# Altium PCB 2X-4.5-V3.PcbDoc (part 1 of 2)
Units mil, origin at the board's own origin, x right, y up, seen from the top; angles counter-clockwise.
Board outline 5631.85 x 1583.52 mil, 2 copper layers (TopLayer, BottomLayer); 126 components, 147 nets, 448 pads, 610 vias.
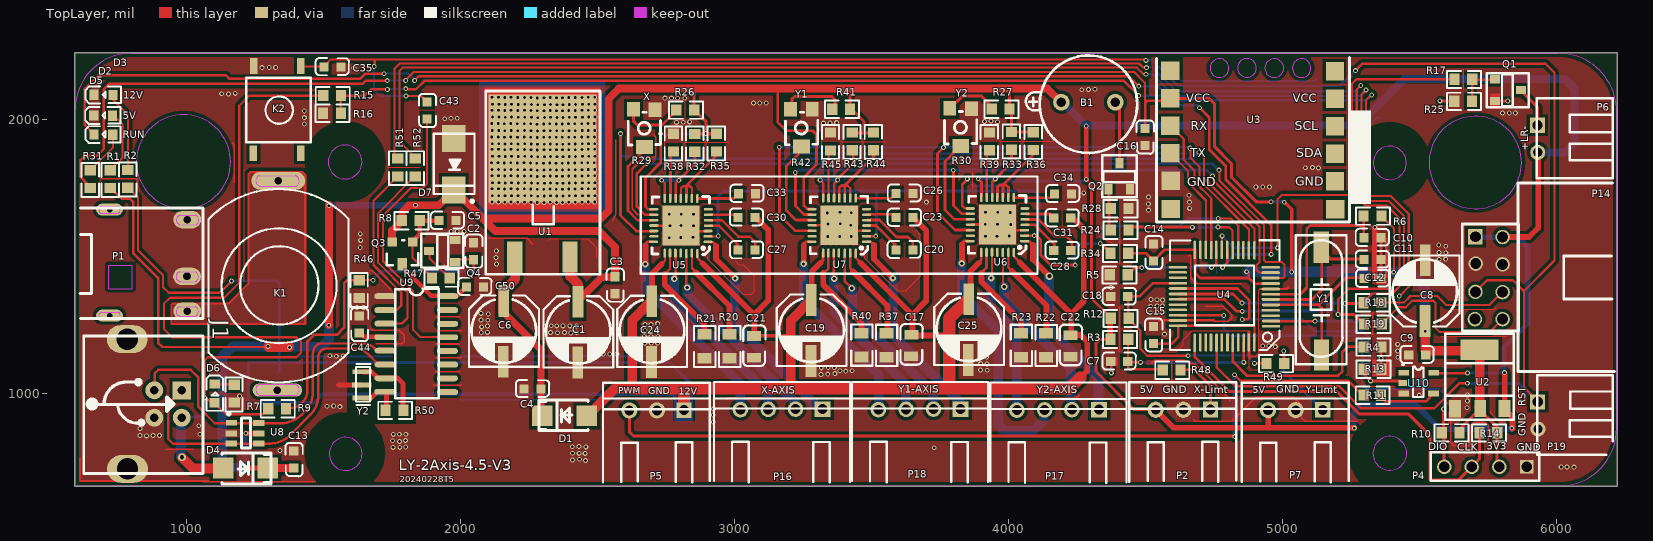
[diagram p0: TopLayer view]
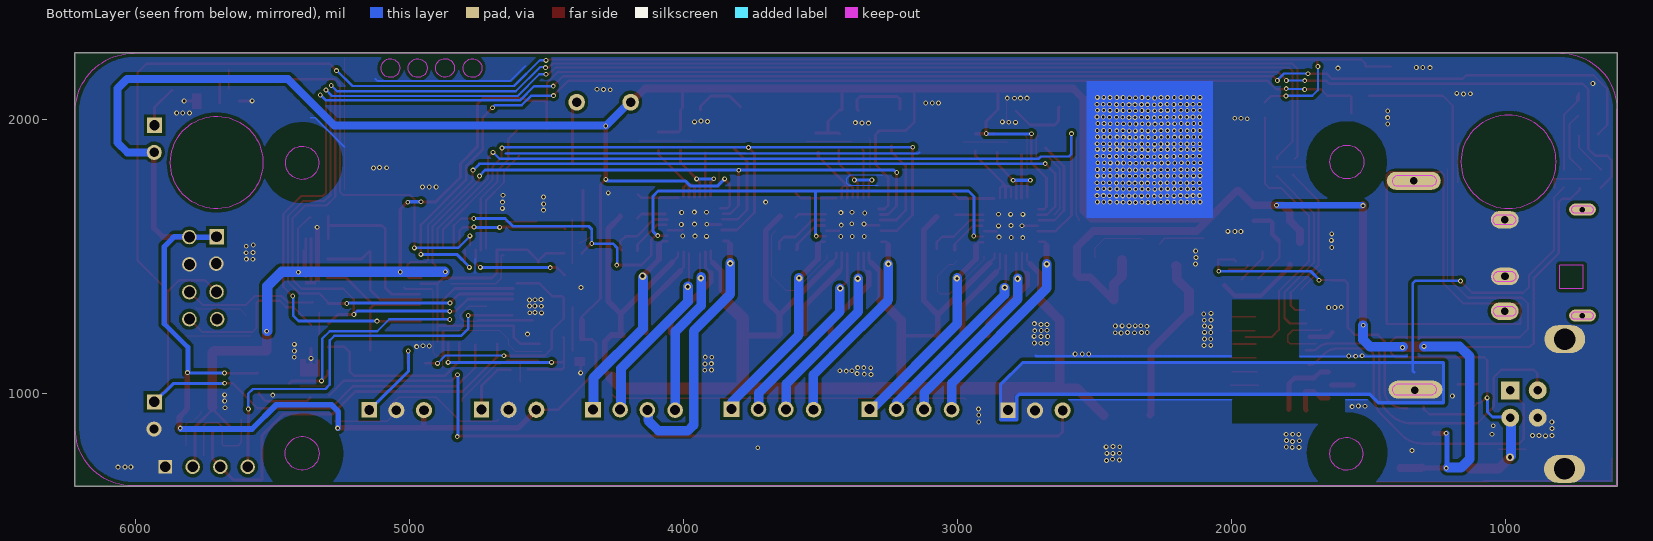
[diagram p1: BottomLayer view, seen from below]

## Layer stack, top to bottom
TopSolder: solder mask 0.4, Solder Resist, Dk 3.5
TopLayer: signal copper 1.4
Dielectric1: core 12.6, FR-4, Dk 4.8
BottomLayer: signal copper 1.4
BottomSolder: solder mask 0.4, Solder Resist, Dk 3.5

## Board outline
591.03,661.34 6222.88,661.34 6222.88,2244.86 591.03,2244.86

## Design rules (kind name [scope] priority, off if disabled: settings)
Clearance [All] p1: gap=7.87 ignorepadtopadclearanceinfootprint=FALSE
FabricationTestPointUsage TestPointUsage [All] p1: valid=0 allowmultiple=FALSE
FabricationTestpoint Testpoint [All] p1: side=3 testpointundercomponent=TRUE minsize=40 maxsize=100 preferedsize=60 minholesize=20 maxholesize=40 preferedholesize=32 testpointgrid=1 allowsidetop=TRUE allowsidebottom=TRUE usegrid=TRUE gridtolerance=0.01
PolygonConnect [All] p1: connectstyle=Relief reliefconductorwidth=0 reliefentries=4 polygonreliefangle="90 Angle" airgapwidth=10
RoutingVias [All] p1: holewidth=28 width=50 viastyle="Through Hole" minholewidth=28 minwidth=50 maxholewidth=28 maxwidth=50
SolderMaskExpansion [All] p1: expansion=4
Width [All] p1: maxlimit=10 minlimit=10 preferedwidth=10
28 further rules are at their usual default settings.

## Components (designator, comment, footprint, x,y, rotation, side; value= is the part's Value field where it differs from the comment)
B1 "" B1 4215.19,2065.81 r0 top locked
C1 "100uf 35v" C1 2437.58,1304.56 r0 top locked
C2 "104/50v 0603" C13 2040.08,1481.64 r0 top locked
C3 "104/50v 0603" C13 2556.33,1357.47 r0 top locked
C4 "104/50V 0603" C13 2300.92,1009.97 r90 top locked
C5 "103/50V 0603" C13 1990.08,1624.56 r90 top locked
C6 "100uf/35V" C1 2165.92,1307.06 r0 top locked
C7 "103/50V 0603" C13 4442.58,1110.81 r90 top locked
C8 "100uf/35V" C1 5511.75,1295.81 r180 top locked
C9 "104/50V/0603" C13 5530.08,1134.56 r90 top locked
C10 "104/50v 0603" C13 5366.75,1562.06 r90 top locked
C11 "22pf 50v/0603" C13 5366.75,1482.06 r90 top locked
C12 "22pf/50v 0603" C13 5367.16,1412.89 r90 top locked
C13 "104/50v 0603" C13 1383.83,721.22 r0 top locked
C14 "104/50v 0603" C13 4522.58,1477.06 r0 top locked
C15 "104/50v 0603" C13 4522.16,1176.02 r0 top locked
C16 "104/50v 0603" C13 4490.91,1898.31 r0 top locked
C17 "105/50V 0805" C17 3638.41,1188.72 r0 top locked
C18 "103/50V 0603" C13 4442.58,1347.06 r90 top locked
C19 "100uf/35V" C1 3289.25,1310.39 r0 top locked
C20 "104/50v 0603" C13 3658,1517.89 r90 top locked
C21 "105/50V 0805" C17 3064.67,1183.31 r0 top locked
C22 "105/50V 0805" C17 4220.08,1186.64 r0 top locked
C23 "104/50v 0603" C13 3658,1635.39 r90 top locked
C24 "100uf/35V" C1 2706.75,1306.22 r0 top locked
C25 "100uf/35V" C1 3863.83,1313.72 r0 top locked
C26 "224/25V 0603" C13 3658.41,1723.72 r90 top locked
C27 "104/50v 0603" C13 3082.17,1517.06 r90 top locked
C28 "104/50v 0603" C13 4234.25,1514.97 r90 top locked
C30 "104/50v 0603" C13 3081.75,1636.22 r90 top locked
C31 "104/50v 0603" C13 4234.25,1633.72 r90 top locked
C33 "224/25V 0603" C13 3083.42,1722.89 r90 top locked
C34 "224/25V 0603" C13 4236.75,1722.06 r90 top locked
C35 "104/50v 0603" C13 1569.87,2185.39 r90 top locked
C43 "104/50v 0603" C13 1870.92,1995.39 r0 top locked
C44 "104/50v 0603" C13 1623,1214.14 r0 top locked
C50 "104/50v 0603" C13 2090.08,1382.89 r90 top locked
D1 "SS54/SMA" D4 2459.25,925.81 r180 top locked
D2 "LED-R/0603" D3 736.75,2018.72 r0 top locked
D3 "LED-R/0603" D3 738,2093.72 r0 top locked
D4 "SS54/SMA" D4 1135.08,721.64 r0 top locked
D5 "LED-G/0603" D3 737.17,1949.14 r0 top locked
D6 "LED-R/0603" D3 1105.92,959.56 r270 top locked
D7 "AE/SMB" D7 1959.25,1868.72 r0 top locked
J1 "4P USB" J1 976.02,1049.14 r0 top locked
K1 "KAN-9A" K1 1285.29,1745.81 r0 top locked
K2 "6*6*11" K2 1248.83,1947.89 r0 top locked
P1 "DC044A" P1 1003.42,1612.06 r0 top locked
P2 "" P5 4717.58,929.14 r0 top locked
P4 "" P4 5850.08,725.39 r0 top locked
P5 "" P5 2795.92,927.06 r0 top locked
P6 "XH2.54-2P-90" P19 5974.25,1983.72 r0 top locked
P7 "" P5 5127.58,927.47 r0 top locked
P14 "DC3-8P" J10 5729.79,1506.64 r0 top locked
P16 "" P16 3299.67,908.31 r0 top locked
P17 "" P16 4308.83,906.64 r0 top locked
P18 "" P16 3803.41,908.31 r0 top locked
P19 "XH2.54-2P-90" P19 5975.08,973.72 r0 top locked
Q1 "MMBT5551/SOT-23" Q4 5776.75,2141.64 r180 top locked
Q2 "MMBT5551/SOT-23" Q4 4370.91,1747.06 r270 top locked
Q3 "MMBT5401/SOT-23" Q3 1794.25,1538.72 r0 top locked
Q4 "MMBT5551/SOT-23" Q4 1979.25,1487.06 r0 top locked
R1 "1K/0603" R31#1 720.5,1740.39 r0 top locked
R2 "2K/0603" R31#1 784.25,1741.64 r0 top locked
R3 "10K/0603" R31#1 4447.58,1197.06 r90 top locked
R4 "10K/0603" R31#1 5372.16,1169.14 r90 top locked
R5 "10K/0603" R31#1 4445.08,1432.47 r90 top locked
R6 "10K/0603" R31#1 5371.33,1647.47 r90 top locked
R7 "1K/0603" R31#1 1172.17,957.47 r0 top locked
R8 "10K/0603" R31#1 1860.5,1630.81 r90 top locked
R9 "2K/0603" R31#1 1372.58,944.14 r90 top locked
R10 "10K/0603" R31#1 5656.75,856.22 r90 top locked
R11 "100R/0603" R31#2 5369.68,993.31 r90 top locked
R12 "10K/0603" R31#1 4448.83,1273.72 r90 top locked
R13 "2K/0603" R31#1 5372.16,1088.31 r90 top locked
R14 "10K/0603" R31#1 5794.66,855.81 r90 top locked
R15 "5.1K/0603" R31#1 1573.42,2087.47 r90 top locked
R16 "10K/0603" R31#1 1573,2022.47 r90 top locked
R17 "2K/0603" R31#1 5703.41,2146.22 r90 top locked
R18 "100R/0603" R31#3 5370.91,1331.22 r90 top locked
R19 "100R/0603" R31#1 5373,1252.89 r90 top locked
R20 "R100/0805" R40 2981.33,1211.22 r0 top locked
R21 "R100/0805" R40 2890.08,1211.22 r0 top locked
R22 "R100/0805" R40 4137.16,1214.97 r0 top locked
R23 "R100/0805" R40 4046.33,1215.39 r0 top locked
R24 "2K/0603" R31#1 4448.41,1596.22 r90 top locked
R25 "10K/0603" R31#1 5702.58,2066.43 r90 top locked
R26 "30K/0603" R31#1 2862.58,2034.56 r90 top locked
R27 "30K/0603" R31#1 4014.25,2037.89 r90 top locked
R28 "10K/0603" R31#1 4448.41,1674.56 r90 top locked
R29 "3*3 10K" R29 2745.08,2033.72 r0 top locked
R30 "3*3 10K" R29 3899.66,2037.06 r0 top locked
R31 "1K/0603" R31#1 647.58,1740.39 r0 top locked
R32 "10K/0603" R31#1 2854.25,1872.89 r0 top locked
R33 "10K/0603" R31#1 4010.08,1880.39 r0 top locked
R34 "10K/0603" R31#1 4447.58,1511.22 r90 top locked
R35 "100R/0603" R31#1 2933,1873.72 r0 top locked
R36 "100R/0603" R31#1 4090.08,1879.14 r0 top locked
R37 "R100/0805" R40 3554.25,1215.39 r0 top locked
R38 "10K/0603" R31#1 2776.33,1873.72 r0 top locked
R39 "10K/0603" R31#1 3929.66,1878.72 r0 top locked
R40 "R100/0805" R40 3464.25,1215.81 r0 top locked
R41 "30K/0603" R31#1 3431.75,2037.47 r90 top locked
R42 "3*3 10K" R29 3318.83,2034.56 r0 top locked
R43 "10K/0603" R31#1 3428.41,1878.72 r0 top locked
R44 "100R/0603" R31#1 3506.33,1878.72 r0 top locked
R45 "10K/0603" R31#1 3349.67,1877.89 r0 top locked
R46 "10K/0603" R31#1 1629.25,1338.72 r0 top locked
R47 "2K/0603" R31#1 1970.5,1421.22 r90 top locked
R48 "470R/0603" R31#1 4638,1084.97 r90 top locked
R49 "470R/0603" R31#1 5016.75,1109.14 r90 top locked
R50 "1M/0603" R31#1 1801.33,938.31 r90 top locked
R51 "100R/0603" R31#1 1769.67,1782.89 r0 top locked
R52 "100R/0603" R31#1 1833.83,1782.89 r0 top locked
U1 "7805/TO263-3" U1 2185.92,1467.89 r0 top locked
U2 "1117-3.3/SOT-223" U2 5639.25,938.72 r0 top locked
U3 "" U3 4598.21,2168.93 r0 top locked
U4 "GD32F303CCT6" U4 4962.58,1252.89 r0 top locked
U5 "HR4988" U5 2893.42,1525.81 r0 top locked
U6 "HR4988" U5 4048.83,1528.93 r0 top locked
U7 "HR4988" U5 3471.23,1526.64 r0 top locked
U8 "UL26-SOT23-6" U8 1158.83,907.89 r0 top locked
U9 "CH340G/SOP-16" U9 1748.73,1345.81 r0 top locked
U10 "74LVC1G17/SOT23-5" V10 5466.33,1065.81 r0 top locked
Y1 "8M/HC49S" Y1 5120.08,1487.89 r0 top locked
Y2 "12M" Y2 1652.58,987.47 r0 top locked

## Footprints (in the part's own frame and the unit in brackets; to place one, negate y for a bottom-side part, rotate by r counter-clockwise, add the part's x,y. Pads: shape width x height; smd on the part's side, far side on the other; paste and mask are expansions set on the pad)
B1 [mil]
  round 60.93 hole 34: 1(-22,-2) 2(175,-2)
  silkscreen extent -152,-187 255,169
C1 [mil]
  rect 38.74x116.11 smd: 1(-9,31) 2(-10,-191)
  silkscreen extent -135,-209 120,51
C13 [mil]
  rect 33.37x33.37 smd: 1(7,7) 2(7,69)
  silkscreen extent -23,-23 40,99
C17 [mil]
  rect 50.93x34.93 smd: 1(7,27) 2(6,-52)
  silkscreen extent -33,-83 49,66
D3 [mil]
  rect 33.37x37.37 smd: 1(-7,-4) 2(-76,-3)
  silkscreen extent -107,-34 22,27
D4 [mil]
  rect 74.94x75.37 smd: 1(-2,7) 2(161,7)
  silkscreen extent -6,-51 173,61
D7 [mil]
  rect 84.74x98.11 smd: 1(16,62) 2(16,-125)
  silkscreen extent -57,-169 92,80
J1 [mil]
  rect 67.37x65.37 hole 32: 1(6,-37)
  round 65.37 hole 32: 2(6,-137) 3(-94,-37) 4(-94,-137)
  oval 149.37x101.37 hole 78: 5(-193,150) 6(-192,-324)
  silkscreen extent -352,-341 84,161
J10 [mil]
  rect 52.93x54.93 hole 40: 1(-25,66)
  round 52.93 hole 40: 2(74,65) 3(-24,-32) 4(74,-35) 5(-25,-135) 6(74,-136) 7(-27,-235) 8(74,-235)
  silkscreen extent -73,-278 132,113
K1 [mil]
  oval 197.37x65.37 hole 28: 1(49,31)
  oval 181.1x47.24 hole 28: 2(46,-733)
  KeepOutLayer lines w4: -19,-712 112,-712 ; -18.99,-711.92 ccw(c-13,-731) -17.6,-750.46 ; -19,50 112,50 ; -18.99,50.08 ccw(c-13,31) -17.6,11.54 ; -18,-751 114,-751 ; -18,11 115,11 ; 112.02,-711.51 cw(c104,-732) 114.85,-751.14 ; 112.02,50.49 cw(c104,30) 114.85,10.86
  silkscreen extent -205,-705 305,1
K2 [mil]
  rect 27.37x57.37 smd: 1(-5,-70) 2(168,-70) 3(168,248) 4(-4,248)
  silkscreen extent -31,-31 205,206
P1 [mil]
  oval 101.37x63.37 hole 28: 1(-1,-311) 2(-2,-184) 3(-1,23)
  oval 97.37x43.37 hole 20: 4(-285,60) 5(-285,-327)
  KeepOutLayer lines w4: -317.45,-340.39 cw(c-309,-328) -316.15,-314.82 ; -317.45,46.61 cw(c-309,59) -316.15,72.18 ; -317,-340 -254,-340 ; -317,47 -253,47 ; -316,-315 -254,-315 ; -316,72 -254,72 ; -253.89,-315.67 cw(c-258,-328) -253.46,-340.18 ; -253.89,72.33 cw(c-258,60) -253.46,47.82 ; -30,-295 28,-295 ; -30,-168 28,-168 ; -29.91,-295 ccw(c-24,-312) -27.29,-329.7 ; -29.91,-168 ccw(c-24,-185) -27.29,-202.7 ; -29,-330 29,-330 ; -29,-203 28,-203 ; -29,39 29,39 ; -28.91,39 ccw(c-23,22) -26.29,4.3 ; -28,4 29,4 ; 28.14,-294.39 cw(c21,-312) 28.83,-329.31 ; 28.14,-168.39 cw(c21,-186) 28.83,-203.31 ; 29.14,38.61 cw(c22,21) 29.83,3.69
  silkscreen extent -392,-338 57,65
P4 [mil]
  rect 48.93x48.93 hole 38: 1(42,7)
  round 52.93 hole 38: 2(-58,7) 3(-159,7) 4(-259,7)
  silkscreen extent -309,-43 88,60
P5 [mil]
  rect 55.84x56.93 hole 36: 1(20,13)
  round 58.93 hole 36: 2(-79,12) 3(-180,12)
  silkscreen extent -276,-251 114,112
P16 [mil]
  rect 58.93x56.93 hole 36: 1(22,35)
  round 56.93 hole 36: 2(-77,35) 3(-177,34) 4(-278,33)
  silkscreen extent -375,-233 122,134
P19 [mil]
  rect 54.93x54.93 hole 38: 1(-43,-4)
  round 54.93 hole 34: 2(-42,-103)
  silkscreen extent -45,-197 231,94
Q3 [mil]
  rect 35.16x33.37 smd: 1(31,15) 2(-44,15)
  rect 33.37x45.16 smd: 3(-7,-66)
  silkscreen extent -63,-70 52,22
Q4 [mil]
  rect 37.16x29.37 smd: 1(1,-6) 2(1,73) 3(-94,34)
  silkscreen extent -123,-28 31,97
R29 [mil]
  rect 46.93x52.93 smd: 1(-35,3) 2(-114,4)
  rect 60.93x50.93 smd: 3(-74,-133)
  silkscreen extent -133,-126 -15,-7
R31#1 [mil]
  rect 41.37x37.37 smd: 1(1,10) 2(1,75)
  silkscreen extent -31,-22 32,102
R31#2 [mil]
  rect 41.37x37.37 smd: 1(1,10) 2(1.42,72.92)
  silkscreen extent -31,-22 32,102
R31#3 [mil]
  rect 37.01x37.37 smd: 1(1,9.98)
  rect 41.37x37.37 smd: 2(1,75)
  silkscreen extent -31,-22 32,102
R40 [mil]
  rect 50.93x38.93 smd: 1(0,5) 2(0,-82)
  silkscreen extent -38,-114 40,36
U1 [mil]
  rect 55.16x113.37 smd: 1(12,30) 3(213,31)
  rect 393.17x395.37 smd: 2(113,427)
  silkscreen extent -94,-32 323,637
U2 [mil]
  rect 42.93x62.93 smd: 1(-9,6) 2(83,7) 3(172,7)
  rect 138.93x74.93 smd: 4(81,222)
  silkscreen extent -45,-34 205,280
U3 [mil]
  rect 66.93x66.93 smd: 1(-7,10) 2(-7,-91) 3(-7,-191) 4(-7,-292) 5(-6,-392) 6(-6,-495) 7(595,-496) 8(594,-394) 9(594,-293) 10(594,-193) 11(594,-92) 12(594,8)
  silkscreen extent -57,-543 726,58
U4 [mm]
  oval 1.7x0.25 smd: 1(-0.102,-0.178) 2(-0.102,0.305) 3(-0.127,0.787) 4(-0.127,1.295) 5(-0.102,1.803) 6(-0.127,2.311) 7(-0.127,2.794) 8(-0.127,3.277) 9(-0.127,3.785) 10(-0.152,4.293) 11(-0.127,4.801) 12(-0.127,5.283) 25(-8.738,5.309) 26(-8.738,4.826) 27(-8.738,4.318) 28(-8.738,3.81) 29(-8.738,3.327) 30(-8.738,2.819) 31(-8.738,2.337) 32(-8.738,1.829) 33(-8.738,1.346) 34(-8.738,0.838) 35(-8.738,0.356) 36(-8.738,-0.127)
  oval 0.25x1.7 smd: 13(-1.651,6.858) 14(-2.159,6.858) 15(-2.667,6.883) 16(-3.15,6.883) 17(-3.658,6.883) 18(-4.166,6.909) 19(-4.674,6.909) 20(-5.182,6.909) 21(-5.639,6.883) 22(-6.147,6.909) 23(-6.655,6.909) 24(-7.163,6.909) 37(-7.163,-1.702) 38(-6.655,-1.676) 39(-6.147,-1.676) 40(-5.664,-1.676) 41(-5.156,-1.702) 42(-4.674,-1.676) 43(-4.14,-1.676) 44(-3.658,-1.702) 45(-3.15,-1.676) 46(-2.642,-1.702) 47(-2.159,-1.676) 48(-1.651,-1.676)
  silkscreen extent -9.47,-2.39 0.69,7.8
U5 [mil]
  oval 33.47x9.45 smd: 1(10,28) 2(10,48) 3(10,68) 4(11,87) 5(11,107) 6(11,127) 7(11,147) 15(-188,147) 16(-188,127) 17(-188,107) 18(-188,88) 19(-188,68) 20(-188,48) 21(-189,28)
  oval 9.45x33.47 smd: 8(-29,187) 9(-49,187) 10(-69,187) 11(-89,187) 12(-108,187) 13(-128,187) 14(-148,187) 22(-148,-13) 23(-129,-13) 24(-109,-13) 25(-90,-13) 26(-69,-14) 27(-49,-13) 28(-29,-14)
  rect 135.45x145.47 smd: 29(-89,88)
  silkscreen extent -195,-18 15,194
U8 [mil]
  rect 40.95x21.37 smd: 1(5,-14) 2(4,-53) 3(4,-90) 4(104,-90) 5(104,-53) 6(104,-15)
  silkscreen extent -9,-107 74,23
U9 [mil]
  oval 77.17x21.37 smd: 1(-25,10) 2(-25,-41) 3(-25,-90) 4(-25,-140) 5(-24,-189) 6(-24,-240) 7(-24,-290) 8(-25,-339) 9(204,-340) 10(203,-290) 11(204,-240) 12(203,-190) 13(204,-140) 14(204,-91) 15(204,-41) 16(204,10)
  silkscreen extent 13,-363 171,37
V10 [mil]
  rect 38.93x20.93 smd: 1(-23,10) 2(-23,-27) 3(-23,-65) 4(85,-65) 5(86,10)
  silkscreen extent -28,-78 49,40
Y1 [mil]
  rect 55.84x114.93 smd: 1(22,47)
  rect 55.84x112.93 smd: 2(23,-347)
  silkscreen extent -72,-381 114,90
Y2 [mil]
  rect 70.87x17.37 smd: 1(-12,-3) 2(-13,44) 3(-12,92)
  silkscreen extent -34,-29 18,120

## Part data
Y2: "CSTNE12M0G520000R0"

## Free pads (board coordinates)
  oval 196.93x64.93 smd far side: 6(1327.89,1014.56)

## Via types
v1: diameter 17.72, hole 9.84, TopLayer to BottomLayer, tented both sides, 597 vias
v2: diameter 23.62, hole 11.81, TopLayer to BottomLayer, tented both sides, 11 vias
v3: diameter 27.56, hole 15.75, TopLayer to BottomLayer, tented both sides, 2 vias

## Nets (pads, with @x,y where several pads share a name; then routed paths per layer and width w, separated by ;. In a path a pad name is that pad's centre, name@x,y a point inside that pad or via, vN(x,y) a via of type N, cw(c..) or ccw(c..) an arc to the next point about the centre after c; other vN are vias at no path point)
D3-2: C1.2 C2.2 C3.1 C4.2 C5.1 C6.2 C7.2 C8.2 C9.2 C10.1 C11.1 C12.1 C13.2 C14.2 C15.2 C16.1 C17.2 C18.2 C19.2 C21.2 C22.2 C24.2 C25.2 C26.1 C33.1 C34.1 C35.1 C44.2 C50.1 D2.2 D3.2 D7.1 J1.4 J1.5 J1.6 K2.4 P1.2 P1.3 P2.2 P4.1 P5.2 P7.2 P14.3 P14.4 P19.2 Q1.2 Q2.2 Q4.2 R4.1 R5.2 R7.1 R13.1 R16.2 R20.2 R21.2 R22.2 R23.2 R25.2 R28.1 R29.1 R30.1 R37.2 R38.2 R39.2 R40.2 R42.1 R45.2 R46.1 U1.2 U2.1 U3.5 U4.8 U4.23 U4.35 U4.47 U5.3 U5.18 U5.29 U6.3 U6.18 U6.29 U7.3 U7.18 U7.29 U8.2 U9.1 U10.3 Y2.2 | length 16951
  TopLayer w2.94: 5236.65,2224.77 5237.27,2224.14
  TopLayer w3.87: 1209.77,1409.14 1209.77,1816.64 1213.52,1820.39 ; 1667.69,1450.39 1674.35,1450.39 ; 1733.1,1827.47 1734.77,1825.81 1853.52,1825.81 ; 2320.6,1559.56 2326.85,1565.81 2464.77,1565.81 2497.27,1533.31 2497.27,1493.72 ; 2742.69,1821.64 2745.6,1824.56 2745.6,1933.31 R38.2@2763.1,1950.81 ; 2816.44,1915.81 2817.69,1917.06 2978.52,1917.06 ; v1@2818.94,2078.31 2821.02,2076.22 v1@2821.02,1993.31 ; 2901.85,1500.81 2901.85,1489.97 3029.35,1362.47 3060.6,1362.47 3072.27,1374.14 3072.27,1429.97 3031.85,1470.39 3016.02,1470.39 3001.85,1484.56 ; 3317.69,1824.97 3317.69,1927.89 3323.1,1933.31 ; 3386.85,1922.06 3388.94,1919.97 3551.85,1919.97 ; 3475.19,1507.47 3475.19,1494.14 3594.35,1374.97 3624.35,1374.97 3678.52,1429.14 3678.52,1580.81 3661.44,1597.89 ; 3868.52,1812.06 3869.35,1811.22 3869.35,1749.97 ; 3969.35,1924.56 3971.85,1922.06 4163.1,1922.06 ; 4878.94,1138.31 4878.94,1094.97 4878.94,1129.97 4885.19,1136.22 4902.27,1136.22 4914.56,1148.52 4914.56,1376.64 4919.77,1381.85
  TopLayer w3.94: 4518.52,1153.52 4612.06,1153.52 4637.9,1179.35 4637.9,1197.06 4671.02,1230.18 4874.15,1230.18 4878.1,1226.22 ; 5237.27,1744.56 5237.27,2224.14 ; 5297.69,1032.06 5303.1,1026.64 5400.19,1026.64 ; 5578.1,1209.56 5816.85,1209.56 5818.52,1211.22 ; 5593.94,1284.14 5618.52,1308.72 5774.35,1308.72 5780.6,1314.97 ; 5759.77,937.47 5759.77,928.31 5793.1,894.97 5810.19,894.97 5815.19,889.97 5815.19,807.47
  TopLayer w4.87: 1057.69,682.06 1062.27,677.47 1471.44,677.47 ; 1166.44,1914.97 1173.1,1908.31 1173.1,1769.97 ; 1669.77,1236.22 1675.19,1230.81 1775.19,1230.81 1793.52,1212.47 1793.52,1189.56 1785.19,1181.22 1690.6,1181.22 ; 1674.35,1450.39 1675.6,1450.39 1747.69,1378.31 ; 1940.6,1472.06 1940.6,1465.81 1951.85,1454.56 2012.27,1454.56 ; 2099.77,1567.47 2100.6,1566.64 2243.1,1566.64 2263.94,1545.81 ; 2555.19,1630.81 2566.44,1654.56 2566.44,1927.47 ; 2648.94,1652.06 2626.85,1674.14 2626.85,1821.22 2667.69,1862.06 2708.52,1862.06 2712.69,1866.22 2712.69,1936.64 2704.77,1944.56 ; 4336.44,1572.06 4369.77,1554.56 4380.6,1549.56 ; 4406.02,1473.72 4406.02,1637.89 ; 4536.44,1630.39 4538.94,1627.89 4653.1,1627.89 ; 4656.02,1505.81 4666.02,1505.81 4666.02,1420.39 4684.77,1401.64 4850.19,1401.64
  TopLayer w4.94: 2968.31,977.47 2973.52,982.68 3263.94,982.68 3264.35,983.1 4246.02,983.1 4259.35,996.43 ; 4521.65,1111.43 4532.06,1121.85 4642.9,1121.85 4666.65,1108.31 4681.02,1108.31 4807.27,982.06 4807.27,970.39 ; 4594.56,1042.27 4595.6,1043.31 4595.6,1120.6 ; 4674.35,905.81 4680.19,899.97 4815.19,899.97 4863.94,948.72 4901.85,986.64 5040.19,986.64 5068.1,958.72 5068.1,912.47 5081.44,899.14 5209.77,899.14 5274.35,899.14 ; 5616.65,906.64 5614.77,904.77 5614.77,821.64 5626.44,809.97 5680.81,809.97 5684.15,813.31 5684.15,879.97 5698.73,894.56 5741.65,894.56 5752.06,884.14 5752.06,774.14 ; 5661.02,2110.81 5661.02,2184.14
  TopLayer w5.87: 687.27,1783.72 820.6,1783.72 820.6,1749.14 ; 924.35,796.64 925.19,797.47 1026.02,797.47 ; 4656.02,1502.47 4656.02,1505.81 ; 4718.1,1319.56 4782.69,1319.56 4815.19,1287.06 4815.19,1277.47 4801.85,1264.14 4753.52,1264.14 4750.19,1267.47
  TopLayer w6.87: 4402.69,1154.56 4404.77,1156.64 4404.77,1316.22
  TopLayer w7.87: 610.6,763.72 610.6,680.81 1077.69,680.81
  TopLayer w8.87: U5.29@2858.94,1593.52 U5.3@2901.85,1593.52 ; U6.29@4003.1,1596.22 U6.3@4057.27,1596.22 ; v1@4374.15,1075.18 4375.6,1076.64 C7.2@4375.6,1115.6 ; 4551.02,1268.31 4551.85,1267.47 4750.19,1267.47 ; 4878.1,1139.14 4878.94,1138.31 ; 4919.77,1381.85 5014.98,1381.85 5020.6,1387.47
  TopLayer w9.87: U5.18@2707.69,1613.1 U5.29@2753.94,1613.1 ; U7.18@3286.44,1614.56 U7.29@3338.94,1614.56 ; U7.29@3432.69,1594.97 U7.3@3478.31,1594.97 ; U6.18@3863.31,1617.06 U6.29@3905.19,1617.06 ; 4878.1,1139.14 4878.1,1226.22 ; R4.1@5360.19,1165.18 5360.19,1094.35 R13.1@5362.06,1092.47
  TopLayer w10.87: C12.1@5359.35,1416.64 C10.1@5359.35,1565.39 ; v1@5576.02,2068.52 5576.23,2068.31 R25.2@5623.31,2068.31 ; Q1.2@5780.19,2067.47 v1@5823.52,2067.47
  TopLayer w11.87: 2504.77,1683.72 2508.52,1687.47
  TopLayer w12.87: 2508.52,1687.47 2508.52,2097.47
  TopLayer w16.87: 1553.52,1032.89 1555.19,1031.22 1555.6,1031.64 Y2.2@1636.02,1031.64
  BottomLayer w2.87: 3272.29,1794.58 3275.42,1797.71 3393.12,1797.71 3404.79,1786.04 3404.79,1768.54 3395,1758.75 3290,1758.75
  BottomLayer w3.87: 4760.21,1492.08 4761.25,1491.04 4761.25,1439.17
  BottomLayer w4.87: 5237.5,1900 5344.17,2006.67 5363.33,2006.67
  BottomLayer w5.87: 1505,977.5 1582.08,977.5 ; 1999.79,977.71 2592.71,977.71 ; 3138.54,1880.42 3142.5,1876.46 4649.79,1876.46 ; 4577.5,2196.25 4632.5,2141.25 5117.92,2141.25 5125.83,2149.17
  BottomLayer w7.87: 1358.96,1135 1748.96,1135
  BottomLayer w8.87: 2001.88,1135.83 2711.67,1135.83 2713.75,1137.92
  other v1: 6017.48,732.27 6038.94,732.27 6064.56,731.64 2456.02,755.81 2408.52,757.47 2433.94,760.39 2408.52,782.47 2432.69,782.06 2454.77,782.06 1341.02,792.47 3729.35,802.47 1753.1,803.72 1777.69,803.72 1799.77,805.39 2407.69,806.22 2457.27,805.81 2432.27,806.64 1777.27,825.39 1751.44,827.89 1798.94,828.72 853.52,845.81 829.35,847.47 877.27,847.06 901.02,847.47 1753.94,851.22 1048.52,851.64 1776.44,851.64 1800.19,851.64 829.77,872.47 1044.35,882.89 830.19,896.22 2922.5,896.25 2922.5,922.08 2922.92,943.75 5673.94,948.31 1559.35,952.47 1512.69,953.72 1536.44,954.56 5675.19,972.89 1193.52,991.64 5499.58,994.58 5675.19,995.39 3316.02,1069.97 3340.19,1071.22 3366.44,1072.89 4375.6,1075.81 3406.02,1082.06 3384.77,1083.72 3429.35,1083.72 3922.48,1085.39 3898.1,1086.22 3316.44,1094.14 3342.27,1094.97 3364.35,1094.97 3921.64,1108.31 3898.31,1109.35 5360.19,1128.72 3897.06,1132.89 3921.02,1133.1 5421.02,1132.89 1546.44,1136.22 1571.44,1137.06 1522.69,1138.31 2521.02,1144.97 2544.77,1144.56 2570.6,1144.56 5420.6,1155.39 4974.35,1171.64 4928.52,1174.14 2099.77,1175.39 4951.02,1174.97 2075.6,1176.22 5420.6,1179.97 2672.69,1184.14 2695.6,1184.14 2719.35,1184.97 2075.6,1199.56 2098.52,1199.56 2671.02,1208.31 2694.77,1208.72 2720.19,1209.14 4569.77,1217.06 2353.52,1222.06 2402.69,1221.64 2423.94,1222.06 2075.6,1222.89 2307.27,1223.31 2328.52,1222.89 2379.35,1223.31 2098.52,1223.72 2694.35,1230.39 2718.1,1229.97 2673.1,1231.22 2076.85,1243.72 2308.52,1246.22 2098.52,1247.06 2351.02,1247.47 2373.94,1247.47 2398.94,1247.47 2423.52,1246.64 2331.02,1247.89 2673.1,1252.06 2694.77,1252.06 2719.35,1255.39 2098.94,1267.89 2074.77,1269.14 2101.02,1290.81 2074.77,1292.89 4518.52,1294.97 4561.44,1295.39 4542.27,1296.22 1622.27,1314.56 1645.19,1314.56 1598.94,1315.81 4518.94,1319.14 4542.69,1319.56 4562.69,1319.97 4542.27,1342.47 4562.27,1342.06 4520.19,1343.31 4374.35,1387.47 2131.44,1473.31 5572.27,1490.81 5596.02,1491.02 2129.35,1496.64 5596.85,1514.35 5571.85,1515.39 2130.6,1520.81 1633.94,1533.31 5596.44,1538.1 5571.02,1542.47 1635.19,1559.56 2761.85,1569.56 2803.52,1569.97 2848.1,1571.22 3384.35,1573.31 3340.19,1573.72 3426.02,1573.72 3916.44,1574.14 3958.52,1574.97 4003.1,1575.39 1633.94,1583.31 1965.6,1592.06 1987.27,1592.06 2013.1,1592.47 5337.69,1607.47 2850.19,1612.47 2764.35,1612.89 2804.35,1613.72 3424.35,1614.97 4008.1,1617.47 3915.19,1618.31 3341.44,1619.14 3959.77,1618.72 3386.02,1620.39 2761.44,1654.56 2806.02,1654.56 2850.6,1654.97 3338.52,1659.56 3425.6,1660.81 4006.85,1661.22 3384.77,1662.06 3916.02,1662.06 3960.6,1662.47 4511.02,1669.97 4661.44,1676.22 4510.6,1692.47 2280.19,1697.47 2304.35,1697.89 2350.19,1697.89 2372.27,1697.89 2161.02,1698.72 2208.52,1698.72 2233.1,1699.14 2256.85,1698.72 2326.85,1698.72 2395.19,1698.72 2418.1,1698.72 2443.52,1699.14 3700.19,1699.14 4661.02,1699.14 2114.77,1699.56 2138.52,1699.56 2184.35,1699.56 2466.02,1699.56 2489.35,1699.56 4511.44,1717.89 2281.44,1720.81 2305.6,1721.22 2351.44,1721.22 2373.52,1721.22 2162.27,1722.06 2209.77,1722.06 2234.35,1722.47 2258.1,1722.06 2328.1,1722.06 2396.44,1722.06 2419.35,1722.06 2444.77,1722.47 2116.02,1722.89 2139.77,1722.89 2185.6,1722.89 2467.27,1722.89 2490.6,1722.89 4659.35,1724.14 4274.77,1732.89 2279.77,1745.81 2303.94,1746.22 2349.77,1746.22 2371.85,1746.22 2160.6,1747.06 2208.1,1747.06 2232.69,1747.47 2256.44,1747.06 2326.44,1747.06 2394.77,1747.06 2417.69,1747.06 2443.1,1747.47 2114.35,1747.89 2138.1,1747.89 2183.94,1747.89 2465.6,1747.89 2488.94,1747.89 4903.1,1754.14 4928.1,1754.56 4952.69,1754.56 2281.85,1767.89 2306.02,1768.31 2351.85,1768.31 2373.94,1768.31 2162.69,1769.14 2210.19,1769.14 2258.52,1769.14 2328.52,1769.14 2396.85,1769.14 2419.77,1769.14 2116.44,1769.97 2140.19,1769.97 2186.02,1769.97 2234.77,1769.56 2445.19,1769.56 2467.69,1769.97 2491.02,1769.97 2280.19,1792.89 2304.35,1793.31 2350.19,1793.31 2372.27,1793.31 2161.02,1794.14 2208.52,1794.14 2256.85,1794.14 2326.85,1794.14 2395.19,1794.14 2418.1,1794.14 2114.77,1794.97 2138.52,1794.97 2184.35,1794.97 2233.1,1794.56 2443.52,1794.56 2466.02,1794.97 2489.35,1794.97 2280.19,1815.81 2304.35,1816.22 2350.19,1816.22 2372.27,1816.22 2161.02,1817.06 2208.52,1817.06 2233.1,1817.47 2256.85,1817.06 2326.85,1817.06 2395.19,1817.06 2418.1,1817.06 2443.52,1817.47 2114.77,1817.89 2138.52,1817.89 2184.35,1817.89 2466.02,1817.89 2489.35,1817.89 5131.85,1823.72 5083.94,1824.56 5110.19,1825.81 2278.52,1840.81 2302.69,1841.22 2348.52,1841.22 2370.6,1841.22 2159.35,1842.06 2206.85,1842.06 2231.44,1842.47 2255.19,1842.06 2325.19,1842.06 2393.52,1842.06 2416.44,1842.06 2441.85,1842.47 2113.1,1842.89 2136.85,1842.89 2182.69,1842.89 2464.35,1842.89 2487.69,1842.89 2281.85,1864.56 2306.02,1864.97 2351.85,1864.97 2373.94,1864.97 2162.69,1865.81 2210.19,1865.81 2234.77,1866.22 2258.52,1865.81 2328.52,1865.81 2396.85,1865.81 2419.77,1865.81 2445.19,1866.22 2116.44,1866.64 2140.19,1866.64 2186.02,1866.64 2467.69,1866.64 2491.02,1866.64 2280.19,1889.56 2304.35,1889.97 2350.19,1889.97 2372.27,1889.97 2161.02,1890.81 2208.52,1890.81 2233.1,1891.22 2256.85,1890.81 2326.85,1890.81 2395.19,1890.81 2418.1,1890.81 2443.52,1891.22 2114.77,1891.64 2138.52,1891.64 2184.35,1891.64 2466.02,1891.64 2489.35,1891.64 2281.02,1909.97 2305.19,1910.39 2351.02,1910.39 2373.1,1910.39 2161.85,1911.22 2209.35,1911.22 2257.69,1911.22 2327.69,1911.22 2396.02,1911.22 2418.94,1911.22 2115.6,1912.06 2139.35,1912.06 2185.19,1912.06 2233.94,1911.64 2444.35,1911.64 2466.85,1912.06 2490.19,1912.06 2279.35,1934.97 2303.52,1935.39 2349.35,1935.39 2371.44,1935.39 2160.19,1936.22 2207.69,1936.22 2256.02,1936.22 2326.02,1936.22 2394.35,1936.22 2417.27,1936.22 2113.94,1937.06 2137.69,1937.06 2183.52,1937.06 2232.27,1936.64 2442.69,1936.64 2465.19,1937.06 2488.52,1937.06 2280.6,1958.72 2304.77,1959.14 2350.6,1959.14 2372.69,1959.14 2161.44,1959.97 2208.94,1959.97 2233.52,1960.39 2257.27,1959.97 2327.27,1959.97 2395.6,1959.97 2418.52,1959.97 2443.94,1960.39 2115.19,1960.81 2138.94,1960.81 2184.77,1960.81 2466.44,1960.81 2489.77,1960.81 1429.35,1984.14 2278.94,1983.72 2303.1,1984.14 2348.94,1984.14 2371.02,1984.14 2159.77,1984.97 2207.27,1984.97 2231.85,1985.39 2255.6,1984.97 2325.6,1984.97 2393.94,1984.97 2416.85,1984.97 2442.27,1985.39 2113.52,1985.81 2137.27,1985.81 2183.1,1985.81 2464.77,1985.81 2488.1,1985.81 3324.77,1987.47 3348.52,1987.89 3372.69,1989.14 2788.52,1990.39 2812.69,1990.81 2836.02,1992.06 3959.77,1992.06 3912.69,1993.72 3936.44,1994.97 1942.27,2003.31 1964.77,2005.39 1987.69,2005.39 1429.77,2007.47 2281.85,2007.47 2306.02,2007.89 2351.85,2007.89 2373.94,2007.89 2162.69,2008.72 2210.19,2008.72 2234.77,2009.14 2258.52,2008.72 2328.52,2008.72 2396.85,2008.72 2419.77,2008.72 2445.19,2009.14 2116.44,2009.56 2140.19,2009.56 2186.02,2009.56 2467.69,2009.56 2491.02,2009.56 5803.52,2024.14 5850.6,2024.14 5828.1,2024.56 1429.35,2031.64 2280.19,2032.47 2304.35,2032.89 2350.19,2032.89 2372.27,2032.89 2161.02,2033.72 2208.52,2033.72 2233.1,2034.14 2256.85,2033.72 2326.85,2033.72 2395.19,2033.72 2418.1,2033.72 2443.52,2034.14 2114.77,2034.56 2138.52,2034.56 2184.35,2034.56 2466.02,2034.56 2489.35,2034.56 2281.85,2054.56 2306.02,2054.97 2351.85,2054.97 2373.94,2054.97 2162.69,2055.81 2210.19,2055.81 2234.77,2056.22 2258.52,2055.81 2328.52,2055.81 2396.85,2055.81 2419.77,2055.81 2445.19,2056.22 2116.44,2056.64 2140.19,2056.64 2186.02,2056.64 2467.69,2056.64 2491.02,2056.64 3069.35,2061.22 3091.85,2061.22 3115.6,2060.81 5823.1,2068.31 5574.77,2068.72 2791.85,2078.31 2746.02,2078.72 2770.19,2078.72 2818.1,2078.72 2280.19,2079.56 2304.35,2079.97 2350.19,2079.97 2372.27,2079.97 2161.02,2080.81 2208.52,2080.81 2233.1,2081.22 2256.85,2080.81 2326.85,2080.81 2395.19,2080.81 2418.1,2080.81 2443.52,2081.22 2114.77,2081.64 2138.52,2081.64 2184.35,2081.64 2466.02,2081.64 2489.35,2081.64 1153.1,2094.14 1127.69,2094.97 1177.27,2096.22 4267.69,2109.14 4291.85,2109.97 4315.6,2111.22 680.6,2132.47 1610.6,2188.31 1274.77,2189.97 1301.44,2190.39 1324.77,2190.81
D5-2: D5.2 U4.2 | length 6394.2
  TopLayer w7.87: v1@1832.69,2142.47 1832.69,2145.18 1846.23,2158.72 4439.98,2158.72 v1@4477.27,2121.43 ; v1@5324.35,2090.18 5304.77,2070.6 5304.77,1733.72 5317.06,1721.43 5395.6,1721.43 5461.44,1655.6 5461.44,1389.77 5428.1,1356.43 v1@5428.1,1355.81
  TopLayer w8.87: D5.2@660.39,1946.43 660.39,1948.72 628.1,1981.02 628.1,2112.27 677.89,2162.06 1143.1,2162.06 1156.23,2148.93 1348.94,2148.93 1459.14,2148.93 1632.27,2148.93 1650.81,2167.47 v1@1722.69,2167.47 ; U4.2@4958.94,1264.97 v1@5120.6,1264.97
  BottomLayer w7.87: v1@1720.21,2167.71 1721.04,2168.54 1807.92,2168.54 v1@1833.54,2142.92
  BottomLayer w8.87: v1@4475.42,2122.5 4544.79,2122.5 4596.88,2070.42 5305,2070.42 v1@5325,2090.42
  BottomLayer w9.87: v1@5118.33,1264.17 5119.38,1265.21 5405.83,1265.21 5424.58,1283.96 v1@5424.58,1355.21
  other v1: 5119.35,1264.56 5426.85,1356.22 5326.44,2089.97 4475.6,2122.47 1832.27,2142.89 1720.19,2167.89
D6-2: D6.2 R7.2 | length 72.9
  TopLayer w8.87: D6.2@1102.27,1036.22 1104.35,1034.14 R7.2@1174.35,1034.14
J1-1: J1.1 U8.3 U8.4 U9.6 | length 1246.7
  TopLayer w8.87: J1.1@974.35,1003.1 932.69,961.43 932.69,834.56 950.39,816.85 1156.02,816.85 1156.44,817.27 1261.85,817.27 1264.35,819.76 ccw(c1269.38,824.79) 1269.38,817.68 1304.35,817.68 ccw(c1304.35,919.27) 1376.19,847.44 1450.4,921.64 ccw(c1377.47,994.57) 1480.6,994.57 1480.6,1131.65 cw(c1518.3,1131.65) 1491.64,1158.31 cw(c1507.24,1142.72) 1507.24,1164.77 1613.73,1164.77 cw(c1613.73,1097.38) 1661.38,1145.03 1690.1,1116.32 ccw(c1717.48,1143.7) U9.6@1717.48,1104.97
J1-2: D4.1 D6.1 J1.2 R9.2 R15.2 | length 3147.9
  TopLayer w7.87: R9.2@1297.48,943.72 1278.31,924.56 1143.1,924.56 1102.48,965.18 1092.89,965.18 1067.27,985.6 1066.23,986.64 1066.23,1121.85 1077.27,1132.89 1400.39,1132.89 1417.89,1150.39 1417.89,1189.35 1401.23,1206.02 947.48,1206.02 916.85,1236.64 916.85,1327.68 939.35,1350.18 1136.85,1350.18 1191.85,1405.18 1191.85,2051.43 1227.89,2087.47 R15.2@1497.27,2087.47
  TopLayer w8.87: R9.2@1297.48,943.72 R9.2@1297.48,953.1
  TopLayer w34.87: D4.1@1128.94,726.64 D4.1@1131.44,729.14
  TopLayer w35.87: v3@983.1,766.22 1022.69,726.64 D4.1@1128.94,726.64
  BottomLayer w9.87: J1.2@980.83,917.92 984.17,914.58 1046.67,914.58 1065,932.92 v1@1065,984.17
  BottomLayer w35.87: v3@979.17,772.5 979.17,912.5 J1.2@980.42,913.75
  other v1: 1066.44,984.56
  other v3: 983.1,768.1
J1-3: J1.3 U8.1 U8.6 U9.5 | length 1293.5
  TopLayer w8.87: J1.3@884.35,1007.47 883.1,1008.72 883.1,1073.1 897.06,1087.06 1014.35,1087.06 1042.69,1058.72 1042.69,951.64 1102.69,891.64 1159.14,891.64 1159.98,892.47 1264.14,892.47 1264.56,892.06 1344.03,892.06 ccw(c1344.03,999.45) 1419.97,923.51 1432.59,936.13 ccw(c1363.96,1004.77) 1461.02,1004.77 1461.02,1146.64 cw(c1502.27,1146.64) 1473.1,1175.8 cw(c1490.21,1158.7) 1490.21,1182.89 1644.57,1182.89 cw(c1644.57,1124.57) 1685.81,1165.81 1686.3,1165.32 ccw(c1703.73,1182.74) 1703.73,1158.1 U9.5@1728.31,1158.1
K2-1: K2.1
K2-2: K2.2
K2-3: C35.2 C43.2 K2.3 P14.5 P19.1 U4.41 | length 7893.7
  TopLayer w7.87: K2.3@1417.69,2193.72 1417.89,2193.93 1511.02,2193.93 1511.02,2205.39 1525.81,2220.18 1698.31,2220.18 ; v1@1685.39,2196.43 1686.44,2197.47 1686.44,2219.56 1692.27,2219.56 ; 1691.85,2219.97 4498.73,2219.97 v1@4504.35,2214.35 ; C43.2@1878.94,2062.89 C43.2@1878.94,2064.97 ; P14.5@5707.69,1365.6 5707.69,1374.77 5746.65,1413.72 5841.65,1413.72 5881.85,1373.52 5881.85,1023.31 P19.1@5937.69,967.47 ; 5881.23,1373.93 5993.52,1486.22 5993.52,2171.64 5960.6,2204.56
  TopLayer w8.66: v1@1801.02,2086.64 1855.39,2086.64 1877.89,2064.14 C43.2@1877.89,2062.68
  TopLayer w8.87: U4.41@4759.98,1178.31 4759.98,1096.43 4829.15,1027.27 5206.23,1027.27 5286.65,946.85 5555.19,946.85 5646.65,1038.31 v1@5675.4,1038.31 ; v1@5266.44,2179.14 5291.85,2204.56 5960.6,2204.56
  BottomLayer w7.87: v1@1684.38,2194.79 1684.38,2107.71 1704.58,2087.5 1800.42,2087.5 v1@1801.04,2086.88 ; v1@4502.71,2216.88 4503.12,2217.29 4524.38,2217.29 4618.96,2122.71 5208.54,2122.71 v1@5266.67,2180.83
  BottomLayer w11.81: v1@5675.83,1037.5 5675,1036.67 5862.92,1036.67 5929.58,970 P19.1@5930,970
  other v1: 5675.19,1037.89 1800.6,2086.85 5266.85,2179.14 1684.35,2194.14 4502.27,2216.64
P1-1: K1.1 P1.1 | length 2028.9
  TopLayer w7.87: 1232.89,1808.31 1225.39,1800.81 1225.39,1400.6 1154.35,1329.56 949.56,1329.56 944.56,1324.56 944.56,1254.14 1432.69,1254.14 1432.69,1798.31 1421.85,1809.14 1234.14,1809.14
P1-4: P1.4
P1-5: P1.5
P2-1: P2.1 R48.1 | length 212.9
  TopLayer w8.87: R48.1@4632.06,1087.06 R48.1@4632.27,1086.85
  TopLayer w9.87: R48.1@4632.27,1086.85 4679.77,1086.85 4737.9,1028.72 P2.1@4737.9,945.81
P5-3: P5.3 R11.2 | length 3021.7
  TopLayer w8.87: v1@4824.35,1068.31 4825.19,1068.31 4846.02,1047.47 5239.77,1047.47 R11.2@5293.52,993.72
  TopLayer w9.87: P5.3@2616.02,928.31 P5.3@2622.48,934.77
  TopLayer w10.87: P5.3@2616.02,928.31 2616.02,860.6 2631.44,845.18 v1@4825.81,845.18
  BottomLayer w9.87: v1@4825.21,1068.96 4823.33,1067.08 4823.33,845.83 v1@4826.67,842.5
  other v1: 4826.02,842.89 4825.19,1068.72
P6-1: P6.1 Q1.3 | length 150.5
  TopLayer w10.87: Q1.3@5867.69,2106.64 5869.35,2106.64 5931.85,2044.14 P6.1@5931.85,1983.72
P7-1: P7.1 R49.1 | length 309.9
  TopLayer w9.87: R49.1@5005.81,1109.56 5006.02,1109.77 v1@5006.02,1153.72
  BottomLayer w10.87: v1@5004.17,1152.92 5004.17,1081.67 5141.46,944.38 P7.1@5141.67,944.38
  other v1: 5005.19,1155.39
P14-6: P14.6 R18.1 | length 508.4
  TopLayer w7.87: R18.1@5353.73,1333.93 5355.4,1332.27 5443.31,1332.27 5467.69,1356.64 5565.4,1356.64 5598.73,1323.31 5755.6,1323.31 P14.6@5813.52,1381.22
P14-7: P14.7
P14-8: P14.8 R19.1 | length 600.2
  TopLayer w7.87: R19.1@5360.6,1250.81 5360.6,1252.27 5423.52,1315.18 5450.4,1315.18 5474.15,1338.93 5551.23,1338.93 5559.35,1330.81 5559.35,1239.14 5573.94,1224.56 5755.81,1224.56 P14.8@5802.9,1271.64
Q1-1: Q1.1 R17.1 R25.1 | length 166.5
  TopLayer w9.87: R25.1@5694.15,2062.27 5692.9,2063.52 5692.9,2147.06 5693.73,2146.22 Q1.1@5773.73,2146.22
Q2-1: Q2.1 R24.2 R28.2 | length 144.3
  TopLayer w9.87: Q2.1@4367.06,1743.52 4367.06,1669.97 4367.06,1602.47 4367.48,1602.06 R24.2@4369.35,1600.18
Q2-3: B1.2 Q2.3 | length 221.2
  TopLayer w9.87: Q2.3@4403.73,1838.31 4405.6,1840.18 B1.2@4405.6,2058.72
Q3-1: C5.2 Q3.1 R8.1 R47.2 | length 313.4
  TopLayer w7.87: Q3.1@1824.77,1556.85 1824.77,1496.22 1900.39,1420.6 R47.2@1900.39,1420.39
  TopLayer w16.87: Q3.1@1827.48,1558.31 1827.69,1558.31 1851.44,1582.06 1851.44,1624.35 1858.73,1631.64 C5.2@1917.89,1631.64
Q4-3: Q4.3 R47.1 | length 133.7
  TopLayer w7.87: Q4.3@1886.23,1519.77 1886.23,1494.56 1962.48,1418.31 R47.1@1962.48,1417.68